# Altium PCB YYB_2016_2.PcbDoc
Units mil, origin at the board's own origin, x right, y up, seen from the top; angles counter-clockwise.
Board outline 590 x 11950 mil, 2 copper layers (Top Layer, Bottom Layer); 76 components, 58 nets, 220 pads, 97 vias.
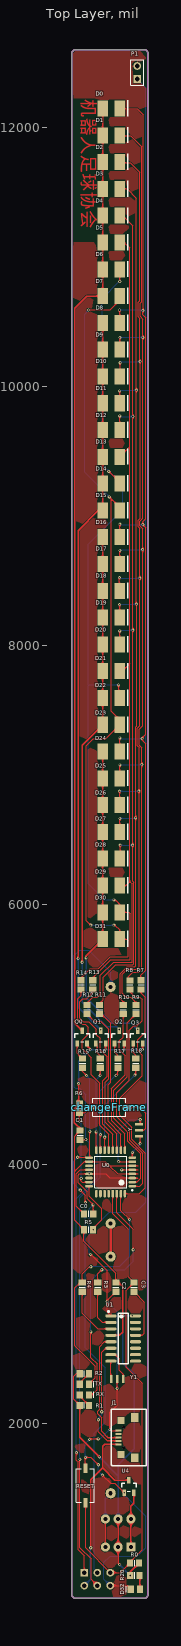
[diagram p0: Top Layer view]
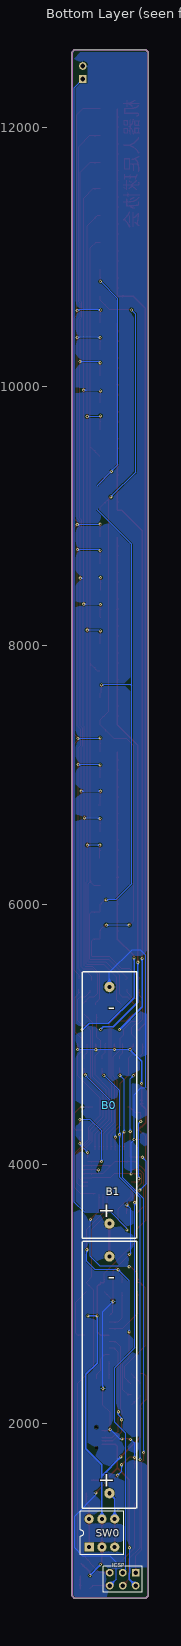
[diagram p1: Bottom Layer view, seen from below]
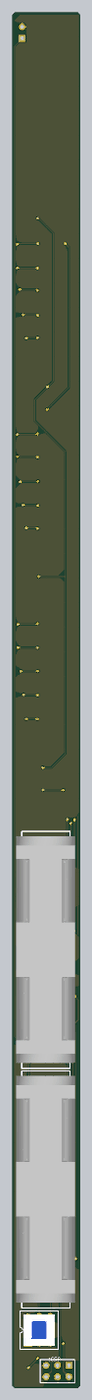
[diagram p2: 3D render of the assembled board from below, using the file's embedded part models]

## Layer stack, top to bottom
Top Solder: solder mask 0.4, Solder Resist, Dk 3.5
Top Layer: signal copper 1.4
Dielectric 1: dielectric 12.6, FR-4, Dk 4.8
Bottom Layer: signal copper 1.4
Bottom Solder: solder mask 0.4, Solder Resist, Dk 3.5

## Board outline
4930,670 4930,12580 4950,12600 5500,12600 5520,12580 5520,670 5500,650 4950,650

## Design rules (kind name [scope] priority, off if disabled: settings)
Clearance [All] p1: gap=7
PolygonConnect [All] p1: connectstyle=Relief reliefconductorwidth=10 reliefentries=4 polygonreliefangle="90 Angle" airgapwidth=10
RoutingVias [All] p1: holewidth=11.81 width=31.5 viastyle="Through Hole" minholewidth=11.81 minwidth=23.62 maxholewidth=248.03 maxwidth=50
SolderMaskExpansion [All] p1: expansion=4
Width [All] p1: maxlimit=30 minlimit=6 preferedwidth=10
30 further rules are at their usual default settings.

## Components (designator, comment, footprint, x,y, rotation, side; value= is the part's Value field where it differs from the comment)
B0 "Battery" BAT 5230,4470 r0 bottom locked
B1 "Battery" BAT 5230,2389 r0 bottom locked
C0 "" 6-0805_N 5060,3616 r180 top
C1 "Cap" 6-0805_N 4994,4224 r90 top
C2 "Cap" 6-0805_N 5270,3050 r90 top
C3 "Cap" 6-0805_N 5410,3050 r90 top
changeFrame "SW-PB" KEY_SODFL_2-LEADS 5220,4440 r180 top
D0 "" LED_3528 5234.06,12146.77 r0 top
D1 "" LED_3528 5234.06,11940 r0 top
D2 "" LED_3528 5234.06,11733.23 r0 top
D3 "" LED_3528 5234.06,11526.45 r0 top
D4 "" LED_3528 5234.06,11319.68 r0 top
D5 "" LED_3528 5234.06,11112.9 r0 top
D6 "" LED_3528 5234.06,10906.13 r0 top
D7 "" LED_3528 5234.06,10699.36 r0 top
D8 "" LED_3528 5234.06,10492.58 r0 top
D9 "" LED_3528 5234.06,10285.81 r0 top
D10 "" LED_3528 5234.06,10079.03 r0 top
D11 "" LED_3528 5234.06,9872.26 r0 top
D12 "" LED_3528 5234.06,9665.48 r0 top
D13 "" LED_3528 5234.06,9458.71 r0 top
D14 "" LED_3528 5234.06,9251.94 r0 top
D15 "" LED_3528 5234.06,9045.16 r0 top
D16 "" LED_3528 5234.06,8838.39 r0 top
D17 "" LED_3528 5234.06,8631.61 r0 top
D18 "" LED_3528 5234.06,8424.84 r0 top
D19 "" LED_3528 5234.06,8218.07 r0 top
D20 "" LED_3528 5234.06,8011.29 r0 top
D21 "" LED_3528 5234.06,7804.52 r0 top
D22 "" LED_3528 5234.06,7597.74 r0 top
D23 "" LED_3528 5234.06,7390.97 r0 top
D24 "" LED_3528 5234.06,7184.2 r0 top
D25 "" LED_3528 5234.06,6977.42 r0 top
D26 "" LED_3528 5234.06,6770.65 r0 top
D27 "" LED_3528 5234.06,6563.87 r0 top
D28 "" LED_3528 5234.06,6357.1 r0 top
D29 "" LED_3528 5234.06,6150.33 r0 top
D30 "" LED_3528 5234.06,5943.55 r0 top
D31 "" LED_3528 5234.06,5736.78 r0 top
D32 "LED" LED_0805 5420.37,719 r180 top
ICSP "ICSP" HDR2X3 5027,847 r0 bottom
J1 "USB_MINI" MICRO_USB 5290,1890 r90 top
P1 "Header 2" HDR1X2 5435,12375 r90 top
Q0 "PNP" PNP_SOT_23 5010,4980 r270 top
Q1 "PNP" PNP_SOT_23 5153.33,4980 r270 top
Q2 "PNP" PNP_SOT_23 5296.67,4980 r270 top
Q3 "PNP" PNP_SOT_23 5440,4980 r270 top
R0 "" 6-0805_N 5414,921 r180 top
R1 "Res1" 6-0805_N 5027,2138 r0 top
R2 "Res1" 6-0805_N 5027,2382 r0 top
R3 "Res1" 6-0805_N 5130,3050 r270 top
R4 "Res1" 6-0805_N 5010,3050 r270 top
R5 "Res1" 6-0805_N 5059,3493 r180 top
R6 "Res1" 6-0805_N 4988,4432 r90 top
R7 "Res1" 6-0805_N 5465,5384 r270 top
R8 "Res1" 6-0805_N 5378,5383 r270 top
R9 "Res1" 6-0805_N 5425,5193 r270 top
R10 "Res1" 6-0805_N 5327,5193 r270 top
R11 "Res1" 6-0805_N 5145,5193 r270 top
R12 "Res1" 6-0805_N 5047,5193 r270 top
R13 "Res1" 6-0805_N 5092,5384 r270 top
R14 "Res1" 6-0805_N 5001,5384 r270 top
R15 "Res1" 6-0805_N 5012,4779 r270 top
R16 "Res1" 6-0805_N 5149,4779 r270 top
R17 "Res1" 6-0805_N 5286,4779 r270 top
R18 "Res1" 6-0805_N 5423,4779 r270 top
R20 "Res1" 6-0805_N 5416.43,825 r180 top
RESET "SW-PB" KEY_SODFL_2-LEADS 5035,1520 r270 top
RX "" LED_0805 5027,2219 r0 top
SW0 "SelfLockSW" KEY_ZS_8*8 5317,1153 r90 bottom
TX "" LED_0805 5027,2301 r0 top
U0 "ATMEL328P" "TQFP 32" 5230,3940 r180 top
U1 "CH340B" SOP16 5350,2530 r0 top
U4 "SC662K" SOT-23 5371,1512 r270 top
Y "8M" XTAL 5471,4262 r0 top
Y1 "12M" XTAL 5280,2319 r270 top

## Footprints (in the part's own frame and the unit in brackets; to place one, negate y for a bottom-side part, rotate by r counter-clockwise, add the part's x,y. Pads: shape width x height; smd on the part's side, far side on the other; paste and mask are expansions set on the pad)
6-0805_N [mm] "Chip Resistor, Body 2.0x1.2mm, IPC Medium Density"
  rect 1.2x1.4 smd: 1(-0.9,0) 2(0.9,0)
  silkscreen extent 0,-0.6 0,0.6, body extent -1.07,-0.7 1.07,0.7, height 0.7
BAT [mm]
  round 2 hole 0.8: 1(0,23.6) 2(0,-22.8)
  silkscreen extent -5.4,-25.8 5.3,26.5, body extent -6.5,-24.7 6.5,25.3, height 13.75
HDR1X2 [mm] "Connector; Header; 2 Position"
  rect 1.5x1.5 hole 0.9: 1(0,0)
  round 1.5 hole 0.9: 2(2.54,0)
  silkscreen extent -1.27,-1.27 3.81,1.27
HDR2X3 [mm] "Connector; Header; 3x2 Position"
  rect 1.5x1.5 hole 0.9: 1(0,0)
  round 1.5 hole 0.9: 2(0,2.54) 3(2.54,0) 4(2.54,2.54) 5(5.08,0) 6(5.08,2.54)
  silkscreen extent -1.27,-1.27 6.35,3.81
KEY_SODFL_2-LEADS [mm] "SODFL, 2-Leads, Body 3.25x8.00mm, IPC Medium Density"
  rect 1.85x0.85 smd: 1(-3.375,0) 2(3.375,0)
  silkscreen extent -3.25,-1.75 3.25,1.75, body extent -4,-1.8 4,1.91, height 2.5
KEY_ZS_8*8 [mm]
  rect 1.8x1.8 hole 0.8: 1(-2.75,1.75)
  round 1.8 hole 0.8: 2(-2.75,-0.75) 3(-2.75,-3.25) 4(2.75,-3.25) 5(2.75,-0.75) 6(2.75,1.75)
  silkscreen extent -4.25,-5 4.25,3.5, body extent -3.5,-4.26 3.5,2.74, height 13
LED_0805 [mm] "Chip LED  Body 2.0x1.2mm, IPC Medium Density"
  rect 1.2x1.4 smd: 1(-0.9,0) 2(0.9,0)
  silkscreen extent 1.8,-0.6 1.8,0.6, body extent -1.07,-0.7 1.07,0.7, height 0.7
LED_3528 [mm] "Chip Diode, 2-Leads, Body 5.00x3.00mm, IPC Medium Density"
  rect 2x3.15 smd: 1(-1.675,0) 2(1.675,0)
  silkscreen extent 3.2,-1.5 3.2,1.6, body extent -2.5,-1.5 2.5,1.5, height 2
MICRO_USB [mm]
  round 0.5 hole 0.5: 0(-2.032,-1.016) 0(2.032,-1.016)
  rect 0.4x1.2 smd: 1(-1.333,0) 2(-0.667,0) 3(0,0) 4(0.667,0) 5(1.333,0)
  rect 1.4x1.4 smd: 6(-3.302,-0.508) 7(3.302,-0.508)
  rect 1.7x1.5 smd: 8(-3.937,-3.175) 9(3.937,-3.175)
  silkscreen extent -5.54,-5.46 5.59,1.4, body extent -4.4,-5.72 4.4,0.02, height 2.71
PNP_SOT_23 [mm]
  rect 1.25x0.7 smd: 1(1.25,-0.95) 2(1.25,0.95) 3(-1.25,0)
  silkscreen extent -0.65,-1.46 0.9,1.46, body extent -1.5,-1.5 1.5,1.5, height 1.3
SOP16 [mm] "CH340G"
  oval 2.2x0.6 smd: 1(-3,7.595) 2(-3,6.325) 3(-3,5.055) 4(-3,3.785) 5(-3,2.515) 6(-3,1.245) 7(-3,-0.025) 8(-3,-1.295) 9(1.8,-1.295) 10(1.8,-0.025) 11(1.8,1.245) 12(1.8,2.515) 13(1.8,3.785) 14(1.8,5.055) 15(1.8,6.325) 16(1.8,7.595)
  silkscreen extent -3.65,-1.83 0.4,8.6, body extent -3.68,-1.78 2.51,8.13, height 1.7
SOT-23 [mm]
  rect 1.25x0.7 smd: 1(1.25,-0.95) 2(1.25,0.95) 3(-1.25,0)
  silkscreen extent -0.65,-1.46 0.9,1.46, body extent -1.5,-1.5 1.5,1.5, height 1.3
"TQFP 32" [mm] "ATMEL 328P"
  oval 1.5x0.5 smd: 1(-4.25,2.8) 2(-4.25,2) 3(-4.25,1.2) 4(-4.25,0.4) 5(-4.25,-0.4) 6(-4.25,-1.2) 7(-4.25,-2) 8(-4.25,-2.8) 17(4.25,-2.8) 18(4.25,-2) 19(4.25,-1.2) 20(4.25,-0.4) 21(4.25,0.4) 22(4.25,1.2) 23(4.25,2) 24(4.25,2.8)
  oval 0.5x1.5 smd: 9(-2.8,-4.25) 10(-2,-4.25) 11(-1.2,-4.25) 12(-0.4,-4.25) 13(0.4,-4.25) 14(1.2,-4.25) 15(2,-4.25) 16(2.8,-4.25) 25(2.8,4.25) 26(2,4.25) 27(1.2,4.25) 28(0.4,4.25) 29(-0.4,4.25) 30(-1.2,4.25) 31(-2,4.25) 32(-2.8,4.25)
  silkscreen extent -4.38,-3.1 3.1,3.72, body extent -4.57,-4.57 4.57,4.57, height 1.62
XTAL [mm] "Chip Array, ConvexE, 6-Leads, Pitch 1.20mm,  Body 3.20x1.50mm,  IPC Medium Density"
  rect 1.6x0.5 smd: 1(-0.6,1.2) 2(-0.6,0) 3(-0.6,-1.2)

## Part data
C0: library part Cap, "Capacitor"
C1 C2 C3: "Capacitor"
changeFrame RESET: "Switch"
D0 D1 D2 D3 D4 D5 D6 D7 D8 D9 D10 D11 D12 D13 D14 D15 D16 D17 D18 D19 D20 D21 D22 D23 D24 D25 D26 D27 D28 D29 D30 D31 RX TX: library part LED
P1: "Header, 2-Pin"
Q0 Q1 Q2 Q3: "PNP Transistor"
R0: library part Res1, "Resistor"
R1 R2 R3 R4 R5 R6 R7 R8 R9 R10 R11 R12 R13 R14 R15 R16 R17 R18 R20: "Resistor"
SW0: library part SelfLockSwitch, "自锁开关"
U0: library part ATMEL-328P
U1: "usb to uart"
U4: library part SC662k-3.3V, "3.3V 稳压芯片"
Y Y1: library part XTAL

## Via types
v1: diameter 23.62, hole 11.81, Top Layer to Bottom Layer, 97 vias

## Nets (pads, with @x,y where several pads share a name; then routed paths per layer and width w, separated by ;. In a path a pad name is that pad's centre, name@x,y a point inside that pad or via, vN(x,y) a via of type N, cw(c..) or ccw(c..) an arc to the next point about the centre after c; other vN are vias at no path point)
3.3V: C1.2 C2.2 Q0.2 Q1.2 Q2.2 Q3.2 R0.1 R1.1 R2.1 R5.2 R6.2 R20.2 SW0.2 SW0.5 U0.4 U0.6 U0.18 U1.4 U1.16 | length 7258.4
  Top Layer w7: R1.1 4945.5,2184.07 4945.5,2363.5 4964,2382 R2.1 ; C1.2 4951,4216.43 4951,3945 ; C2.2 5270,3159 5023.57,3405.43 R5.2 4951,3565.57 4951,3945 ; 5441,3986 5439.76,3987.24 U0.6 5219.76,3987.24 ; 5443,3925 5442.25,3924.25 U0.4 5282.75,3924.25 5219.76,3987.24 ; 4951,3945 5024.74,4018.74 U0.18 5188.26,4018.74 5219.76,3987.24
  Top Layer w10: R6.2@4970.43,4467.43 4990.72,4467.43 4948.44,4425.16 4948.44,4320.56 5005.57,4263.43 C1.2@5018,4263.43 ; v1(4982,4622) 4982,4481.43 4978,4477.43 R6.2 ; R1.1 4991.57,1890.43 v1(5142,1740) ; Q0.2 5047.4,4912.6 5071,4889 v1(5071,4884) ; v1(5190.73,4885.27) Q1.2 ; U1.4 5297.02,2679.02 5322,2704 5322,3056 5292.57,3085.43 C2.2 ; SW0.5 SW0.2 5287.47,921.53 v1(5299,910) ; v1(5334.07,4882.93) Q2.2 ; v1(5381,825) 5381,852.57 R0.1 ; v1(5475,4884) 5475,4928.39 Q3.2
  Bottom Layer w10: v1(4982,4622) 4982,4795 v1(5071,4884) v1(5475,4884) ; v1(5142,1740) 5287.47,1591.53 ; SW0.5@5287.47,1258.27 5287.47,1591.53 ; v1(5299,910) 5299,907 v1(5381,825) ; v1(5396,2829) 5325,2829 v1(5324,2828) 5324,2464 5411,2377 5411,1804 5287.47,1680.47 5287.47,1591.53
A0: changeFrame.2 R6.1 U0.23 | length 719.3
  Top Layer w7: v1(4988,4330) R6.1 5030.57,4396.57 5074,4440 changeFrame.2 ; v1@4998,3882 4998,3873 5009.74,3861.26 U0.23
  Bottom Layer w7: v1(4988,4330) 5004,4314 5004,3888 v1@4998,3882
  other v1: 5003,3889
A1: P1.1 R5.1 U0.24 | length 9603.3
  Top Layer w7: U0.24 5062.68,3753.32 5161,3655 5161,3572 5094.43,3505.43 v1(5094.43,3493)
  Bottom Layer w7: v1(5094.43,3493) 5094.43,3505.43 5217,3628 5422,3628 5501.5,3707.5 5501.5,12308.5 P1.1
A2: U0.25
A3: U0.26
A4: U0.27
A5: U0.28
A6: U0.19
A7: U0.22
D0/RXD: R3.1 RX.2 U0.30 | length 2015.7
  Top Layer w7: RX.2 5085,2219 5125,2259 5125,2458 5077,2506 v1(5077,2705) ; R3.1 5130,3153 v1(5162,3185) ; U0.30 5277.24,3624.76 5403,3499 v1(5403,3339)
  Bottom Layer w7: v1(5077,2705) 5077,3100 v1(5162,3185) 5338,3185 5403,3250 v1(5403,3339)
D1/TXD: R4.1 TX.2 U0.31 | length 1922.8
  Top Layer w7: TX.2 5111,2349.57 5111,2441 4953,2599 4953,3045 4993.43,3085.43 R4.1 5010,3153 5065,3208 v1(5077,3208) ; U0.31 5309,3772.42 5309,3640 v1(5376,3573)
  Bottom Layer w7: v1(5077,3208) 5071.5,3208 5068.25,3211.25 5299.25,3211.25 5376,3288 v1(5376,3573)
D2: R7.2 U0.32 | length 1911.8
  Top Layer w7: U0.32 5450.68,3772.68 5497,3819 5497,4085 5391,4191 5391,4284 5299,4376 5299,4507 5474,4682 5474,4840 5437,4877 5437,4959 5495,5017 5495,5287 5465,5317 R7.2
D3: R8.2 U0.1 | length 1826.3
  Top Layer w7: R8.2 5378,5332 5421,5289 5455,5289 5473,5271 5473,5106 5436,5069 5407,5069 5372,5034 5372,4965.89 5373,4964.89 5373,4646 5277.14,4550.14 5277.14,4363.86 5377,4264 5377,4185.2 5478,4084.2 5478,3853 5454.76,3829.76 U0.1
D4: R9.2 U0.2 | length 1497.7
  Top Layer w7: R9.2 5358,5090.57 5358,4960.09 5358.35,4959.74 5358.35,4674.35 5255.29,4571.29 5255.29,4354 5255.5,4353.5 5363,4246 5363,4177 5461,4079 5461,3892 5430.26,3861.26
  Top Layer w10: U0.2 5430.26,3861.26
D5: R10.2 U0.9 | length 1168.8
  Top Layer w7: R10.2 5327,4981 5298,4952 5298,4881 5341,4838 5341,4688 5233.44,4580.44 5233.5,4340.5 5340.24,4233.76 U0.9
D6: R11.2 U0.10 | length 1141.8
  Top Layer w7: R11.2 5159.43,5157.57 5230,5087 5230,4631 5211.57,4612.57 5211.57,4329.43 5308.74,4232.26 U0.10
D7: R12.2 U0.11 | length 1198.1
  Top Layer w7: R12.2 5049.23,5157.57 5104.8,5102 5155,5102 5216,5041 5216,4657 5189.71,4630.71 5189.71,4323.29 5277.24,4235.76 U0.11
D8: R13.2 U0.12 | length 1456.5
  Top Layer w7: R13.2 5092,5325 5045,5278 5016,5278 4992,5254 4992,5127 5020,5099 5060,5099 5118,5041 5118,5000 5148,4970 5148,4883 5202,4829 5202,4679 5167.86,4644.86 5167.86,4307.14 5245.75,4229.25 U0.12
D9: R14.2 U0.13 | length 1404.1
  Top Layer w7: R14.2 5001,5303 4974,5276 4974,5118 5012,5080 5035,5080 5057,5058 5057,5002 5011,4956 5011,4891 5035,4867 5036,4867 5081,4822 5081,4690 5146,4625 5146,4300 5214.25,4231.75 U0.13
D10: R18.2 U0.14 | length 735.8
  Top Layer w7: U0.14 5184,4108.57 v1(5184,4208) ; v1(5416,4687) 5423,4694 R18.2
  Bottom Layer w7: v1(5184,4208) 5184,4455 v1(5416,4687)
D11/MOSI: ICSP.4 R17.2 U0.15 | length 4294.9
  Top Layer w7: v1(4993,1721) 4993,1041 5079,955 5079,795 ICSP.4 ; v1(5151,4227) 5151,4111.58 5149,4109.58 U0.15 ; v1(5272,4684) 5286,4698 R17.2
  Bottom Layer w7: v1(4993,1721) 4993,3740 5151,3898 v1(5151,4227) 5151,4566 5150,4567 5266,4683 v1@5266.77,4685.57
D12/MISO: ICSP.1 R16.2 U0.16 | length 4149.6
  Top Layer w7: v1(4966,1773) 4966,1716.45 4979,1703.45 4979,1024 5027,976 ICSP.1 ; v1(5117,4249) 5117,4110.09 U0.16 ; v1(5149,4685) R16.2
  Bottom Layer w7: v1(4966,1773) 4965,1774 4965,3731.88 5127,3893.88 5127,4239 v1(5117,4249) 5117,4653 v1(5149,4685)
D13/SCK: ICSP.3 R15.2 U0.17 | length 4178
  Top Layer w7: v1(4975,4053) 5057.44,4053 5061.44,4049 U0.17 5069,4056.56 v1(5069,4253) ; v1(4995,3799) 5034.5,3759.5 v1(5034.5,3702.5) ; R15.2 5012,4715 v1(5044,4683)
  Bottom Layer w7: v1@4980,4053 v1(4975,4053) 4945.5,4023.5 4945.5,3848.5 v1(4995,3799) ; v1(5034.5,3702.5) 5033.75,3701.75 5033.75,2583.25 5189,2428 5189,2007 5105,1923 5105,869 ICSP.3 ; v1(5044,4683) 5069,4658 v1(5069,4253)
GND: B0.2 C0.1 C1.1 C2.1 changeFrame.1 D32.2 ICSP.6 J1.5 P1.2 RESET.1 U0.3 U0.5 U0.21 U1.1 U4.1 Y1.2 Y.2 | length 7891.9
  Top Layer w7: C1.1 5037.57,4188.57 v1(5039,4190) ; RESET.1 v1(5035,1737) 5078,1737 v1(5135,1680) ; v1(5068,1875) 5072,1879 v1(5134,1879) ; v1(5074.55,3304) 5202,3176.55 v1(5202,2940) ; C0.1 5095.43,3687.57 5048.68,3734.32 5048.68,3787.32 4979,3857 4979,3914 4989,3924 5018,3924 5018.25,3924.25 U0.21 5192.75,3924.25 5224,3893 5365,3893 5365.24,3892.76 U0.3 5440.76,3892.76 5441,3893 ; v1(5166.5,1599.5) 5230,1536 5260.39,1536 v1(5333.6,1462.79) ; ICSP.6 5356.94,747 D32.2 ; U1.1 5204,2856.91 5204,2948.57 C2.1 ; Y1.2 v1(5280,2269) 5280,2140 5224,2084 v1(5224,1953) 5225,1953 5235.5,1942.5 J1.5 ; v1@5314,3957 v1(5315.25,3955.75) U0.5 5442.75,3955.75 ; changeFrame.1 v1(5441,4440) 5456,4440 5501.5,4394.5 5501.5,4278.5 5485,4262 Y.2
  Bottom Layer w7: v1(5035,1737) 5035,1845 v1@5060,1870 ; v1(5063,3924) 5063,4166 v1(5039,4190) 5039,4535 4990,4584 4960,4584 4949,4595 4949,5611.5 4989.5,5652 5059,5652 5230,5481 B0.2 ; v1(5074.55,3304) 5064,3314.55 5064,3654 v1(5095,3685) ; v1(5134,1879) 5150,1879 v1(5224,1953) ; v1(5135,1680) 5135,1631 v1(5166.5,1599.5) ; v1(5202,2940) 5280,2862 v1(5280,2269) ; ICSP.6 5178,796 5178,927 5225,974 5435,974 5499,1038 5499,1283 5333.6,1448.4 v1(5333.6,1462.79)
LED0: D0.2 D8.2 D16.2 D24.2 R7.1 | length 7785.2
  Top Layer w7: v1(5298,10592) 5300,10590 D8.2 ; D24.2 v1@5300,7289 ; D16.2 5301,8839.39 v1(5301,8939) ; D0.2 5434.23,12146.77 5482,12099 5482,10590 v1(5479,10587) 5479,10556 5501.5,10533.5 5501.5,8979.5 5478,8956 v1(5478,8935) 5501.5,8911.5 5501.5,8881 5501.5,7319.5 5473,7291 v1(5473,7284) 5473,7272.25 5501.5,7243.75 5501.5,5495.5 5463,5457 R7.1@5463,5427.43
  Bottom Layer w7: v1(5298,10592) 5474,10592 v1(5479,10587) ; v1(5301,7290) 5307,7284 v1(5473,7284) ; v1(5301,8939) 5305,8935 v1(5478,8935)
LED1: D1.2 D9.2 D17.2 D25.2 R8.1 | length 7588.6
  Top Layer w7: D25.2 5301,6978.42 v1(5301,7081) ; D17.2 5301,8632.61 v1(5301,8736) ; D9.2 5300,10378 v1(5301,10379) ; D1.2 5305,11935 5385,11935 5468,11852 5468,10657.2 5456.69,10645.89 5456.69,10544.31 5479.31,10521.69 5479.31,8985.31 5455.69,8961.69 5455.69,8925.76 5477,8904.45 5477,7384 5450.69,7357.69 5450.69,7234.31 5471,7214 v1(5471,7083) 5471,5506 5445,5480 5400,5480 5366,5446 R8.1@5366,5419.43
  Bottom Layer w7: v1(5301,7081) 5303,7083 v1(5471,7083) ; v1(5301,8736) 5307,8742 v1(5477,8742) ; v1@5301,10380 v1(5479,10380)
LED2: D2.2 D10.2 D18.2 D26.2 R9.1 | length 7606.6
  Top Layer w7: v1(5297,8527) 5297,8427.84 D18.2 ; v1(5299,6878) 5299,6771.65 D26.2 D26.2@5314.35,6770.65 ; D10.2 5302,10081.03 v1(5302,10185) ; D2.2 5305.23,11728 5381,11728 5454,11655 5454,10663 5442.69,10651.69 5442.69,10538.51 5456,10525.2 5456,10195 v1(5457,10194) 5457,8982.8 5441.69,8967.49 5441.69,8919.96 5454.69,8906.96 5454.69,7381.69 5436.69,7363.69 5436.69,7228.51 5448.69,7216.51 5448.69,5522.69 5429,5503 5357,5503 5321,5467 5321,5317 5350,5288 5384.16,5288 R9.1@5438,5234.16
  Bottom Layer w7: v1(5297,8527) 5300,8524 5301,8525 5303,8523 v1(5454.69,8523) ; v1(5299,6878) v1(5448,6878) ; v1(5302,10185) 5312,10195 5313,10194 v1(5457,10194)
LED3: D3.2 D11.2 D19.2 D27.2 R10.1 | length 7180.9
  Top Layer w7: v1(5299,8318) 5299,8219.07 D19.2 ; v1(5299,9968) 5300,9967 D11.2 ; D27.2 5301,6564.87 v1(5301,6668) ; D3.2 5357.55,11526.45 5428.69,11455.31 v1(5428.69,9973.31) 5427.69,9972.31 v1(5427.69,8321.31) 5422.69,8316.31 5430,8309 5430,7381 5422.69,7373.69 5422.69,5531.69 5414,5523 5357,5523 5305,5471 5305,5275 5335,5245 R10.1@5335,5228.43
  Bottom Layer w7: v1@5295,8322 v1(5299,8318) 5302.31,8321.31 v1(5427.69,8321.31) ; v1(5299,9968) 5304.31,9973.31 v1(5428.69,9973.31) ; v1(5301,6668) 5418,6668 v1(5423,6673)
LED4: D4.2 D12.2 D20.2 D28.2 R11.1 | length 6962.2
  Top Layer w7: R11.1@5135.43,5231.43 5173,5269 5173,5444 5268,5539 5399.58,5539 5408.69,5548.11 5408.69,6175.31 5400.69,6183.31 5400.69,8121.69 v1(5401,8122) v1(5401,9770) 5401,11243 5324.32,11319.68 D4.2 ; D28.2 5303,6360.1 v1(5303,6462) ; D20.2 v1(5300,8116) ; D12.2 v1(5300,9775)
  Bottom Layer w7: v1(5300,9775) 5305,9770 v1(5401,9770) ; v1@5301,8117 5303,8115 5310,8122 v1(5401,8122) ; v1(5303,6462) v1(5400,6462)
LED5: D5.2 D13.2 D21.2 D29.2 R12.1 | length 6498.6
  Top Layer w7: R12.1@5029,5227 5090,5288 5127,5288 5151,5312 5151,5456.33 5252.67,5558 5393,5558 5394.69,5559.69 5394.69,6163.31 5377,6181 ; D29.2 5346.33,6150.33 5377,6181 ; D21.2 5319.52,7804.52 5377,7862 ; D13.2 5376,9534.71 5376,11072 5335.1,11112.9 D5.2 ; 5377,9534.71 5377,8129.55 5377,7862 ; 5377,6181 5377,7862
LED6: D6.2 D14.2 D22.2 D30.2 R13.1 | length 6856.4
  Top Layer w7: R13.1@5106,5419.43 5092,5433.43 5092,5439 5231,5578 5379,5578 5380.69,5579.69 5380.69,5932.31 5369.45,5943.55 D30.2 5300,6004 5264,6040 v1(5255,6040) ; v1(5215,9347) 5300,9262 D14.2 ; v1(5291,7699) 5291,7643 5300,7634 D22.2 ; v1(5300,10812) D6.2
  Bottom Layer w7: v1@5255,6039 5181,6039 5058,6162 5058,7693 5064,7699 v1(5291,7699) 5058,7699 5058,8785 5325,9052 5325,9237 v1(5215,9347) 5164,9398 5164,10680 5296,10812 v1(5300,10812)
LED7: D7.2 D15.2 D23.2 D31.2 R14.1 | length 6428.9
  Top Layer w7: R14.1@5011,5419.43 5001,5429.43 5001,5438 5071,5508 5133.33,5508 5225.33,5600 5363,5600 5366.69,5603.69 5366.69,5724.31 5354.22,5736.78 D31.2 5300,5807 5262,5845 v1(5254,5845) ; v1(5060,10592) 5060,10593 5062,10595 5226,10595 5300,10669 D7.2 ; v1(5077,5844) 5077,5845 5043,5879 5043,7230 5097,7284 5193.03,7284 D23.2 5300,7431 5234.5,7496.5 5234.5,9134.5 ; v1(5219,9150) 5234.5,9134.5 ; D15.2 5300,9069 5234.5,9134.5
  Bottom Layer w7: v1(5060,10592) 5028,10560 5028,9341 v1(5219,9150) ; v1(5077,5844) 5253,5844 v1(5254,5845)
NetB0_1: B0.1 B1.2 | length 245.4
  Top Layer w20: B1.2@5230,3295.51 B0.1
NetB1_1: B1.1 SW0.3 SW0.4 | length 432.1
  Top Layer w10: SW0.3 SW0.4
  Bottom Layer w10: SW0.4 5189.05,1418.91 B1.1
NetC0_2: C0.2 U0.20 | length 443.5
  Top Layer w7: C0.2 4965,3675.57 4965,3924 4996.75,3955.75 U0.20
NetC3_1: C3.1 U1.13 | length 427
  Top Layer w7: C3.1 5489,2935.57 5489,2695 5473.02,2679.02 U1.13
NetD0_1: D0.1 D1.1 D2.1 D3.1 D4.1 D5.1 D6.1 D7.1 Q0.3 | length 7303.4
  Top Layer w10: Q0.3 4952.21,5087 4952.21,10607.21 5044.36,10699.36 D7.1 D6.1 D5.1 D4.1 D3.1 D2.1 D1.1 D0.1
NetD8_1: D8.1 D9.1 D10.1 D11.1 D12.1 D13.1 D14.1 D15.1 Q1.3 | length 5880
  Top Layer w10: v1(4978,5588) 4978,8888 5135.16,9045.16 D15.1 D14.1 D13.1 D12.1 D11.1 D10.1 D9.1 D8.1
  Bottom Layer w10: v1(4978,5588) 4978,5212 4980,5210 ; v1(5153,5038) v1@5155,5035 ; 4980,5210 5152.5,5037.5 v1@5155,5035 ; 4980,5210 v1@5155,5035
NetD16_1: D16.1 D17.1 D18.1 D19.1 D20.1 D21.1 D22.1 D23.1 Q2.3 | length 4029.4
  Top Layer w10: v1(5010,5558) 5010,7232.86 D23.1 D22.1 D21.1 D20.1 D19.1 D18.1 D17.1 D16.1
  Bottom Layer w10: v1(5010,5558) 5010,5248 5198.5,5059.5 5276.5,5059.5 v1(5297,5039)
NetD24_1: D24.1 D25.1 D26.1 D27.1 D28.1 D29.1 D30.1 D31.1 Q3.3 | length 2460.8
  Top Layer w10: v1(5040,5591) 5040,5608.67 5051.33,5620 D31.1 D30.1 D29.1 D28.1 D27.1 D26.1 D25.1 D24.1
  Bottom Layer w10: v1(5040,5591) 5040,5285 5237,5088 5387,5088 5440,5035 v1(5440,5040)
NetD32_1: D32.1 R20.1 | length 107.6
  Top Layer w10: R20.1 5455.8,821.06 D32.1
NetQ0_1: Q0.1 R15.1 | length 132.7
  Top Layer w7: Q0.1 4972.6,4853.84 R15.1
NetQ1_1: Q1.1 R16.1 | length 125.2
  Top Layer w7: Q1.1@5127.6,4930.79 5127.6,4859.4 5149,4838 R16.1
NetQ2_1: Q2.1 R17.1 | length 129.4
  Top Layer w7: Q2.1 5262.6,4930.79 5262.6,4864.4 5286,4841 R17.1
NetQ3_1: Q3.1 R18.1 | length 124.8
  Top Layer w7: Q3.1 5402.6,4859.4 5423,4839 R18.1
NetR1_2: R1.2 RX.1 | length 110.4
  Top Layer w7: RX.1 4991.57,2208.87 R1.2
NetR2_2: R2.2 TX.1 | length 110.4
  Top Layer w7: TX.1 4991.57,2311.13 R2.2
NetR3_2: R3.2 U1.2 | length 317.5
  Top Layer w7: R3.2 5130,2813 5163.98,2779.02 U1.2
NetR4_2: R4.2 U1.3 | length 437.7
  Top Layer w7: R4.2 5010,2848 5128.98,2729.02 U1.3
NetSW0_1: SW0.1 SW0.6 U4.2 | length 427.4
  Top Layer w10: SW0.1 SW0.6 5385.9,1359.9 5408.4,1382.4 U4.2
NetU0_7: U0.7 Y.1 | length 586.1
  Top Layer w7: v1(5290.26,4018.74) U0.7 ; Y.1@5457.38,4306.24 5458,4306.87 v1(5458,4343)
  Bottom Layer w7: v1(5290.26,4018.74) 5290.26,4256.26 5378,4344 5443,4344 5444,4343 v1(5458,4343)
NetU0_8: U0.8 Y.3 | length 190.5
  Top Layer w7: U0.8 5398,4050.91 v1(5398,4090) ; v1(5457,4159) 5457.38,4159.38 Y.3@5457.38,4211.76
  Bottom Layer w7: v1(5398,4090) 5462,4154 v1(5457,4159)
NetU1_7: U1.7 Y1.1 | length 246.4
  Top Layer w7: U1.7 5266.98,2529.02 5298,2498 5298,2408 5327.24,2378.76 Y1.1
NetU1_8: U1.8 Y1.3 | length 140.1
  Top Layer w7: U1.8 5231.89,2340.89 Y1.3
RESET: C3.2 ICSP.5 R0.2 RESET.2 U0.29 | length 3840.2
  Top Layer w7: RESET.2@5028,1387.13 5036,1379.13 5036,1038 ICSP.5 5304.57,847 R0.2 5378.57,927.57 5475,1024 5475,2309 5351,2433 5351,3026.43 C3.2 5366,3129.43 5366,3497 5245.75,3617.25 U0.29
UD+: J1.3 U1.5 | length 925.6
  Top Layer w7: 5209,1890 5161,1938 5161,2041 5129,2073 5129,2094.55 5144,2109.55 5144,2592 5181.02,2629.02 U1.5
  Top Layer w10: 5209,1890 J1.3
UD-: J1.2 U1.6 | length 893.2
  Top Layer w7: v1(5135,2027) 5135,1934 5205.25,1863.75 ; v1(5161,2089) 5161,2549 5191.02,2579.02 U1.6
  Top Layer w10: 5205.25,1863.75 J1.2
  Bottom Layer w7: v1(5135,2027) 5135,2038 5161,2064 v1(5161,2089)
USB_5V: ICSP.2 J1.1 U4.3 | length 1512.2
  Top Layer w10: v1(5076,1039) 5076,1565 5169,1658 5169,1823 5183.5,1837.5 J1.1 ; 5167,1656 5261.79,1561.21 U4.3
  Bottom Layer w10: ICSP.2 5075.47,795.47 5075.47,808.48 5075.47,834.51 5075.47,847.52 ; 5074,841 5074,1037 v1(5076,1039)
pads on no net: J1.0 J1.4 J1.6 J1.7 J1.8 J1.9 U1.9 U1.10 U1.11 U1.12 U1.14 U1.15

## Polygon pours and split planes (outlines as drawn)
GND on Bottom Layer "GND" (solid, pour order 14): 4930,12580 5514,12580 5517,12583 5517,667 5517,657 5502,642 5494,650 4950,650 4930,670
GND on Top Layer "GND" (solid, pour order 16): 5517,667 5503,653 5485,653 4947,653 4930,670 4927,673 4927,12589 5506,12589 5517,12600

## Keep-outs
Keep-Out Layer:
  lines w10: 4930,670 4930,1020 4930,12580 4950,12600 5500,12600 5517,12583 5517,667 5500,650 4950,650 4930,670

## Other copper
Top Layer:
  text "机器人足球协会" at 4974,12218 h177.17 r270

## Silkscreen, mask and mechanical layers (free items; w line width, h text height)
Top Solder:
  text "机器人足球协会" at 4974,12218 h177.17 r270

## Text inside footprints (layer, text, board x,y; h text height)
B0: Bottom Overlay "-" at 5186.63,5284.96 h196.85 r180; Bottom Overlay "+" at 5186.63,3725.91 h196.85 r180
B1: Bottom Overlay "+" at 5186.63,1644.91 h196.85 r180; Bottom Overlay "-" at 5186.63,3203.96 h196.85 r180